# EAGLE board RC_Engine_Sound_ESP32 (EAGLE 7.6.0)
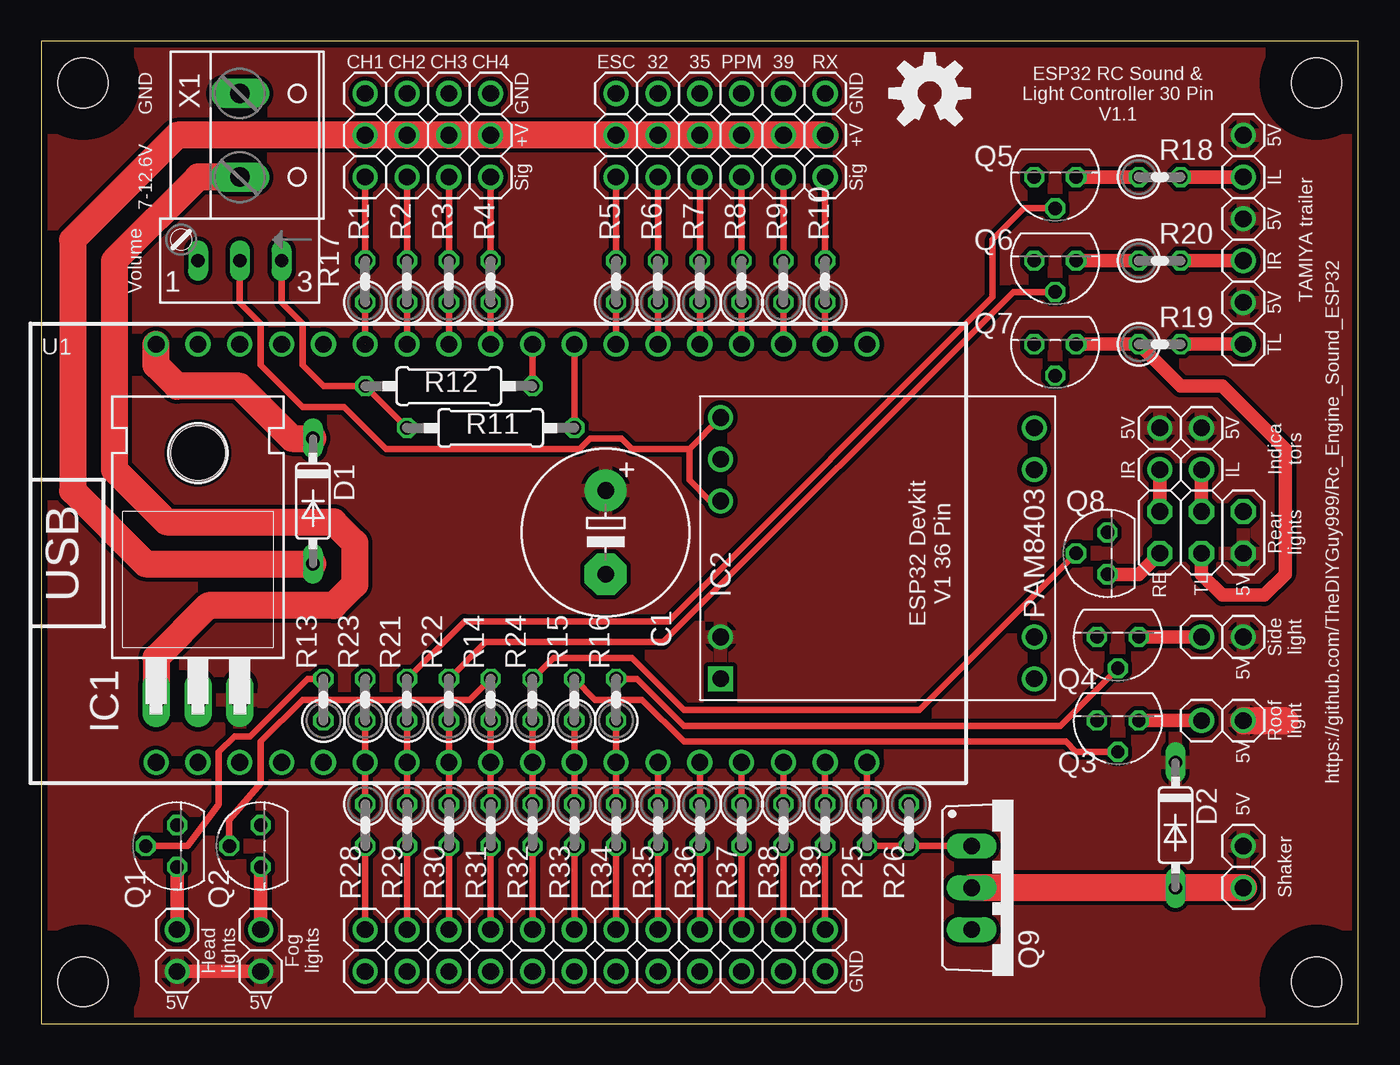
[diagram p0: board, top side]
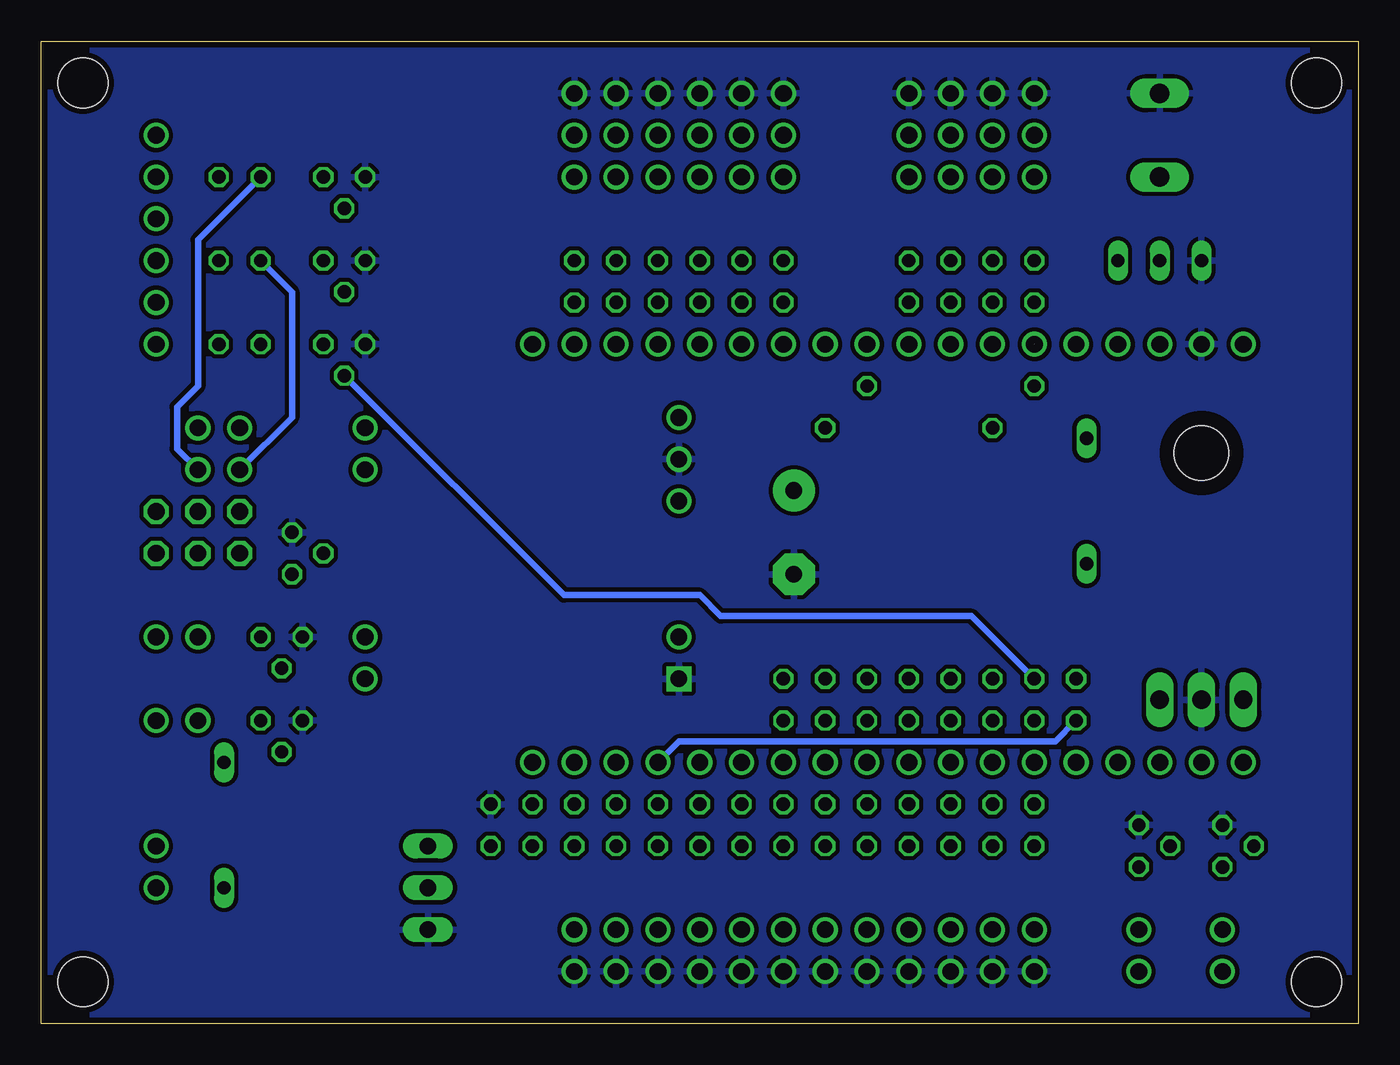
[diagram p1: board, bottom side, seen from below]

Size 80.01 x 59.69 mm. Coordinates in mm from the lower left corner, seen from the top.
Outline: 0,0 80.01,0 80.01,59.69 0,59.69 0,0
Copper layers (1*16): Top 0.0356mm / dielectric 1.5011mm / Bottom 0.0356mm
Design rules "OSHPark_LaenPCBOrder": minimum track width 6mil, minimum drill 13mil, track to track 6mil, track to pad 6mil, pad to pad 6mil, via to via 6mil, smd to smd 6mil, copper to edge 15mil, drill to drill 6mil, minimum pad ring 7mil, minimum via ring 7mil, stop-mask expansion 3mil, vias tented up to drill 0mil, thermal gap 10mil
Net classes: 0 5V: clearance 0.254 mm
Holes 3 mm at 2.54,57.15 2.54,2.54 77.47,2.54 77.47,57.15
tRestrict: area -0.7,53.9 to 5.8,60.4; area 74.2,53.9 to 80.7,60.4; area 74.2,-0.7 to 80.7,5.8; area -0.7,-0.7 to 5.8,5.8

## Footprints (pad centres in the part's own frame; a part is rotated, then mirrored left to right if it is on the bottom)
E5-10,5 = drill 1.016 pad 2.54: + -2.54,0 | drill 1.016 pad 2.54 octagon: - 2.54,0
DO35-7 = drill 0.813 long: A 3.81,0; C -3.81,0
TO220H = drill 1.118 long: 1 -2.54,-10.16; 2 0,-10.16; 3 2.54,-10.16 | hole 3.302: 0,4.826
PAM8403 = drill 1.016 square: 1 -7.62,8.89 | drill 1.016: 2 -5.08,8.89; 3 3.175,8.89; 4 5.715,8.89; 5 8.255,8.89; 6 7.62,-10.16; 7 5.08,-10.16; 8 -5.08,-10.16; 9 -7.62,-10.16
1X03 = drill 1.016 pad 1.524: 1 -2.54,0; 2 0,0; 3 2.54,0
1X02 = drill 1.016 pad 1.524: 1 -1.27,0; 2 1.27,0
1X06 = drill 1.016 pad 1.524: 1 -6.35,0; 2 -3.81,0; 3 -1.27,0; 4 1.27,0; 5 3.81,0; 6 6.35,0
2X03 = drill 1.016 octagon: 1 -2.54,-1.27; 2 -2.54,1.27; 3 0,-1.27; 4 0,1.27; 5 2.54,-1.27; 6 2.54,1.27
TO92 = drill 0.813 octagon: 1 1.27,0; 2 0,1.905; 3 -1.27,0
TO220BV = drill 1.016 long: D 0,-2.54; G -2.54,-2.54; S 2.54,-2.54
0207/2V = drill 0.813 octagon: 1 -1.27,0; 2 1.27,0
0207/10 = drill 0.813 octagon: 1 -5.08,0; 2 5.08,0
S64W = drill 0.813 long: A 2.54,1.27; E -2.54,1.27; S 0,1.27
ESP32-DEVKITV1 = drill 1.016: 3V3 -24.13,-12.7; D0 -13.97,-12.7; D1 13.97,-12.7; D2 -8.89,-12.7; D3 11.43,-12.7; D4 -6.35,-12.7; D5 1.27,-12.7; D6 -21.59,-12.7; D7 -19.05,-12.7; D8 -16.51,-12.7; D9 -13.97,12.7; D10 -16.51,12.7; D11 -19.05,12.7; D12 -8.89,12.7; D13 -11.44,12.7; D14 -6.35,12.7; D15 -11.43,-12.7; D16 -3.81,-12.7; D17 -1.27,-12.7; D18 3.81,-12.7; D19 6.35,-12.7; D21 8.89,-12.7; D22 16.51,-12.7; D23 19.05,-12.7; D25 1.27,12.7; D26 -1.27,12.7; D27 -3.81,12.7; D32 6.35,12.7; D33 3.81,12.7; D34 11.43,12.7; D35 8.89,12.7; D36 16.51,12.7; D39 13.97,12.7; EN 19.05,12.7; GND@1 -21.59,12.7; VIN -24.13,12.7
W237-132 = drill 1.194 long: 1 -2.54,-0.635; 2 2.54,-0.635

## Placement (x,y rotation side)
C1  1000uF  [E5-10,5]  34.29,29.85 270 top
D1  1N5819  [DO35-7]  16.51,31.75 270 top
D2  1N5819  [DO35-7]  68.9,12.06 270 top
IC1  7805T  [TO220H]  9.53,29.85 0 top
IC2  PAM8403  [PAM8403]  50.16,28.58 90 top
JP1  [1X03]  19.68,53.98 270 top
JP2  [1X03]  22.22,53.98 270 top
JP3  [1X03]  24.76,53.98 270 top
JP4  [1X03]  27.3,53.98 270 top
JP5  [1X03]  34.93,53.98 270 top
JP6  [1X03]  37.47,53.98 270 top
JP7  [1X03]  40.01,53.98 270 top
JP8  [1X03]  42.55,53.98 270 top
JP9  [1X03]  45.09,53.98 270 top
JP10  [1X03]  47.62,53.98 270 top
JP11  [1X02]  8.26,4.45 90 top
JP12  [1X02]  13.34,4.45 90 top
JP13  [1X02]  71.75,18.42 180 top
JP14  [1X02]  71.75,23.5 180 top
JP15  [1X06]  73.02,47.62 270 top
JP16  [2X03]  70.48,29.85 0 top
JP17  [1X02]  70.48,34.92 270 top
JP18  [1X02]  67.94,34.92 270 top
JP19  [1X02]  73.02,9.53 270 top
JP21  [1X02]  19.68,4.45 270 top
JP22  [1X02]  22.22,4.45 270 top
JP23  [1X02]  24.76,4.45 270 top
JP24  [1X02]  27.3,4.45 270 top
JP25  [1X02]  29.84,4.45 270 top
JP26  [1X02]  32.39,4.45 270 top
JP27  [1X02]  34.93,4.45 270 top
JP28  [1X02]  37.47,4.45 270 top
JP29  [1X02]  40.01,4.45 270 top
JP30  [1X02]  42.55,4.45 270 top
JP31  [1X02]  45.09,4.45 270 top
JP32  [1X02]  47.62,4.45 270 top
LOGO1  OSHW-LOGOM  [OSHW-LOGO-M]  53.98,56.52 0 top
Q1  BC337-25  [TO92]  8.26,10.79 90 top
Q2  BC337-25  [TO92]  13.34,10.79 90 top
Q3  BC337-25  [TO92]  65.41,18.42 180 top
Q4  BC337-25  [TO92]  65.41,23.5 180 top
Q5  BC337-25  [TO92]  61.59,51.43 180 top
Q6  BC337-25  [TO92]  61.59,46.35 180 top
Q7  BC337-25  [TO92]  61.59,41.27 180 top
Q8  BC337-25  [TO92]  64.77,28.58 90 top
Q9  IRLZ44N  [TO220BV]  59.05,8.26 270 top
R1  330R  [0207/2V]  19.68,45.09 90 top
R2  330R  [0207/2V]  22.22,45.09 90 top
R3  330R  [0207/2V]  24.76,45.09 90 top
R4  330R  [0207/2V]  27.3,45.09 90 top
R5  330R  [0207/2V]  34.93,45.09 90 top
R6  330R  [0207/2V]  37.47,45.09 90 top
R7  330R  [0207/2V]  40.01,45.09 90 top
R8  330R  [0207/2V]  42.55,45.09 90 top
R9  330R  [0207/2V]  45.09,45.09 90 top
R10  330R  [0207/2V]  47.62,45.09 90 top
R11  10k  [0207/10]  27.3,36.2 0 top
R12  10k  [0207/10]  24.76,38.73 0 top
R13  1k  [0207/2V]  17.14,19.69 90 top
R14  1k  [0207/2V]  27.3,19.69 90 top
R15  1k  [0207/2V]  32.39,19.69 90 top
R16  1k  [0207/2V]  34.93,19.69 90 top
R17  20k  [S64W]  12.06,47.62 180 top
R18  200R  [0207/2V]  67.94,51.43 0 top
R19  47R  [0207/2V]  67.94,41.27 0 top
R20  200R  [0207/2V]  67.94,46.35 0 top
R21  1k  [0207/2V]  22.22,19.69 90 top
R22  1k  [0207/2V]  24.76,19.69 90 top
R23  1k  [0207/2V]  19.68,19.69 90 top
R24  1k  [0207/2V]  29.84,19.69 90 top
R25  330R  [0207/2V]  50.16,12.06 270 top
R26  10k  [0207/2V]  52.71,12.06 270 top
R28  330R  [0207/2V]  19.68,12.06 270 top
R29  330R  [0207/2V]  22.22,12.06 270 top
R30  330R  [0207/2V]  24.76,12.06 270 top
R31  330R  [0207/2V]  27.3,12.06 270 top
R32  330R  [0207/2V]  29.84,12.06 270 top
R33  330R  [0207/2V]  32.39,12.06 270 top
R34  330R  [0207/2V]  34.93,12.06 270 top
R35  330R  [0207/2V]  37.47,12.06 270 top
R36  330R  [0207/2V]  40.01,12.06 270 top
R37  330R  [0207/2V]  42.55,12.06 270 top
R38  330R  [0207/2V]  45.09,12.06 270 top
R39  330R  [0207/2V]  47.62,12.06 270 top
U1  ESP32DEVKITV1  [ESP32-DEVKITV1]  31.11,28.58 0 top
X1  [W237-132]  12.7,53.98 270 top

## Library data of the parts
C1 R1-R16 R18-R26 R28-R39 = rcl
D1 D2 = diode
IC1 = linear
IC2 = 00_custom
JP1-JP19 JP21-JP32 = 00_custom_pinhead
LOGO1 = SparkFun-Aesthetics
Q1-Q8 = transistor-npn
Q9 = transistor-power
R17 = pot
U1 = ESP32-DEVKITV1_36pin
X1 = con-wago-508; OC_FARNELL: unknown; OC_NEWARK: unknown

## Nets
5V: C1.+ D2.C IC1.3 IC2.2 JP11.1 JP12.1 JP13.1 JP14.1 JP15.1 JP15.3 JP15.5 JP16.5 JP17.1 JP18.1 JP19.1
5V_ESC: D1.A JP1.2 JP2.2 JP3.2 JP4.2 JP5.2 JP6.2 JP7.2 JP8.2 JP9.2 JP10.2
BAT+: IC1.1 X1.2
D1: R38.1 U1.D1
D2: R21.1 R29.1 U1.D2
D3: R13.1 R37.1 U1.D3
D4: R22.1 R30.1 U1.D4
D5: R15.1 R33.1 U1.D5
D12: R2.1 U1.D12
D13: R1.1 U1.D13
D14: R3.1 U1.D14
D15: R23.1 R28.1 U1.D15
D16: R14.1 R31.1 U1.D16
D17: R24.1 R32.1 U1.D17
D18: R16.1 R34.1 U1.D18
D19: R35.1 U1.D19
D21: R36.1 U1.D21
D22: R39.1 U1.D22
D23: R25.1 U1.D23
D25: R11.2 U1.D25
D26: R12.2 U1.D26
D27: R4.1 U1.D27
D32: R6.1 U1.D32
D33: R5.1 U1.D33
D34: R8.1 U1.D34
D35: R7.1 U1.D35
D36: R10.1 U1.D36
D39: R9.1 U1.D39
GND: C1.- IC1.2 IC2.1 IC2.4 JP1.1 JP2.1 JP3.1 JP4.1 JP5.1 JP6.1 JP7.1 JP8.1 JP9.1 JP10.1 JP21.2 JP22.2 JP23.2 JP24.2 JP25.2 JP26.2 JP27.2 JP28.2 JP29.2 JP30.2 JP31.2 JP32.2 Q1.1 Q2.1 Q3.1 Q4.1 Q5.1 Q6.1 Q7.1 Q8.1 Q9.S R17.A R26.1 U1.GND@1 X1.1
INDICATOR_L: JP16.4 JP17.2 Q5.3 R18.1
INDICATOR_R: JP16.2 JP18.2 Q6.3 R20.1
N$1: IC2.3 IC2.5 R17.S
N$2: R11.1 R12.1 R17.E
N$3: JP1.3 R1.2
N$4: Q9.G R25.2 R26.2
N$5: JP2.3 R2.2
N$6: JP3.3 R3.2
N$7: JP4.3 R4.2
N$8: JP5.3 R5.2
N$9: D1.C U1.VIN
N$10: JP6.3 R6.2
N$11: JP7.3 R7.2
N$12: JP8.3 R8.2
N$13: JP9.3 R9.2
N$14: JP10.3 R10.2
N$15: D2.A JP19.2 Q9.D
N$16: Q1.2 R13.2
N$17: Q2.2 R14.2
N$18: JP11.2 Q1.3
N$19: JP12.2 Q2.3
N$20: Q7.2 R23.2
N$21: JP15.2 R18.2
N$22: Q5.2 R21.2
N$23: JP15.4 R20.2
N$24: Q6.2 R22.2
N$25: JP15.6 R19.2
N$26: Q8.2 R24.2
N$27: Q3.2 R15.2
N$28: JP13.2 Q3.3
N$29: Q4.2 R16.2
N$30: JP14.2 Q4.3
N$32: JP21.1 R28.2
N$33: JP22.1 R29.2
N$34: JP23.1 R30.2
N$35: JP24.1 R31.2
N$36: JP25.1 R32.2
N$37: JP26.1 R33.2
N$38: JP27.1 R34.2
N$39: JP28.1 R35.2
N$40: JP29.1 R36.2
N$41: JP30.1 R37.2
N$42: JP31.1 R38.2
N$43: JP32.1 R39.2
REVERSING: JP16.1 Q8.3
TAILLIGHTS: JP16.3 Q7.3 R19.1

## Tracks (layer width: path | path; a pad name or v marks a point on that pad's centre or on a via)
5V
  Top 0.813: JP12.1 JP11.1
  Top 1.626: JP13.1 75.56,18.42
  pour Top: -3.17,62.86 83.18,62.86 83.18,-1.91 -3.17,-1.91
5V_ESC
  Top 1.626: JP10.2 JP9.2 JP8.2 JP7.2 JP6.2 JP5.2 JP4.2 JP3.2 JP2.2 JP1.2 8.26,53.98 1.91,47.62 1.91,32.38 6.35,27.94 D1.A
BAT+
  Top 1.626: X1.2 9.53,51.43 4.45,46.35 4.45,33.66 7.62,30.48 17.78,30.48 19.05,29.21 19.05,26.67 17.78,25.4 10.16,25.4 6.99,22.23 IC1.1
D1
  Top 0.406: U1.D1 R38.1
D2
  Top 0.406: R29.1 U1.D2 R21.1
D3
  Top 0.406: U1.D3 R37.1
  Bottom 0.406: R13.1 18.41,17.15 41.27,17.15 U1.D3
D4
  Top 0.406: R30.1 U1.D4 R22.1
D5
  Top 0.406: R33.1 U1.D5 R15.1
D12
  Top 0.406: R2.1 U1.D12
D13  (1 unrouted)
  Top 0.406: R1.1 U1.D13
D14
  Top 0.406: R3.1 U1.D14
D15
  Top 0.406: R28.1 U1.D15 R23.1
D16
  Top 0.406: R31.1 U1.D16 R14.1
D17
  Top 0.406: R32.1 U1.D17 R24.1
D18
  Top 0.406: R34.1 U1.D18 R16.1
D19
  Top 0.406: U1.D19 R35.1
D21
  Top 0.406: U1.D21 R36.1
D22
  Top 0.406: U1.D22 R39.1
D23
  Top 0.406: U1.D23 R25.1
D25
  Top 0.406: U1.D25 R11.2
D26
  Top 0.406: U1.D26 R12.2
D27
  Top 0.406: R4.1 U1.D27
D32
  Top 0.406: R6.1 U1.D32
D33
  Top 0.406: R5.1 U1.D33
D34
  Top 0.406: R8.1 U1.D34
D35
  Top 0.406: R7.1 U1.D35
D36
  Top 0.406: R10.1 U1.D36
D39
  Top 0.406: R9.1 U1.D39
GND
  pour Bottom: -1.91,61.59 81.91,61.59 81.91,-1.91 -1.91,-1.91
INDICATOR_L
  Top 0.813: Q5.3 R18.1 | JP16.4 JP17.2
  Bottom 0.406: R18.1 70.48,47.62 70.48,38.73 71.75,37.46 71.75,34.92 JP17.2
INDICATOR_R
  Top 0.813: Q6.3 R20.1 | JP16.2 JP18.2
  Bottom 0.406: R20.1 64.77,44.45 64.77,36.83 JP18.2
N$1
  Top 0.406: R17.S 12.06,43.81 13.34,42.54 13.34,40 15.88,37.46 18.41,37.46 20.95,34.92 32.7,34.92 33.34,35.56 35.24,35.56 35.88,34.92 39.37,34.92 | 39.37,34.92 IC2.5 | IC2.3 40.64,31.75 39.37,33.02 39.37,34.92
N$2
  Top 0.406: R11.1 R12.1 17.14,38.73 15.88,40 15.88,42.54 14.61,43.81 R17.E
N$3
  Top 0.406: JP1.3 R1.2
N$4
  Top 0.406: Q9.G R26.2 R25.2
N$5
  Top 0.406: JP2.3 R2.2
N$6
  Top 0.406: JP3.3 R3.2
N$7
  Top 0.406: JP4.3 R4.2
N$8
  Top 0.406: JP5.3 R5.2
N$9
  Top 1.626: U1.VIN 6.99,40 8.26,38.73 12.06,38.73 15.24,35.56 D1.C
N$10
  Top 0.406: JP6.3 R6.2
N$11
  Top 0.406: JP7.3 R7.2
N$12
  Top 0.406: JP8.3 R8.2
N$13
  Top 0.406: JP9.3 R9.2
N$14
  Top 0.406: JP10.3 R10.2
N$15
  Top 1.626: JP19.2 D2.A Q9.D
N$16
  Top 0.406: R13.2 16.19,20.96 12.7,17.46 11.75,17.46 10.79,16.51 10.79,13.33 8.89,10.79 Q1.2
N$17
  Top 0.406: R14.2 26.04,19.69 15.88,19.69 13.34,17.15 13.34,14.61 11.43,12.38 Q2.2
N$18
  Top 0.813: JP11.2 Q1.3
N$19
  Top 0.813: Q2.3 JP12.2
N$20
  Bottom 0.406: R23.2 23.49,24.77 38.73,24.77 40.01,26.04 48.26,26.04 Q7.2
N$21
  Top 0.813: R18.2 JP15.2
N$22
  Top 0.406: R21.2 25.72,24.45 38.1,24.45 57.79,44.13 57.79,47.62 59.69,49.53 Q5.2
N$23
  Top 0.813: R20.2 JP15.4
N$24
  Top 0.406: R22.2 26.99,23.18 37.78,23.18 59.05,44.45 Q6.2
N$25
  Top 0.813: R19.2 JP15.6
N$26
  Top 0.406: R24.2 31.11,22.23 35.88,22.23 39.05,19.05 53.34,19.05 Q8.2
N$27
  Top 0.406: R15.2 33.66,19.69 36.51,19.69 39.05,17.15 62.23,17.15 62.87,16.51 Q3.2
N$28
  Top 0.813: Q3.3 JP13.2
N$29
  Top 0.406: R16.2 36.2,20.96 39.05,18.1 61.91,18.1 Q4.2
N$30
  Top 0.813: Q4.3 JP14.2
N$32
  Top 0.406: R28.2 JP21.1
N$33
  Top 0.406: R29.2 JP22.1
N$34
  Top 0.406: R30.2 JP23.1
N$35
  Top 0.406: R31.2 JP24.1
N$36
  Top 0.406: R32.2 JP25.1
N$37
  Top 0.406: R33.2 JP26.1
N$38
  Top 0.406: R34.2 JP27.1
N$39
  Top 0.406: R35.2 JP28.1
N$40
  Top 0.406: R36.2 JP29.1
N$41
  Top 0.406: R37.2 JP30.1
N$42
  Top 0.406: R38.2 JP31.1
N$43
  Top 0.406: R39.2 JP32.1
REVERSING
  Top 0.813: Q8.3 66.67,27.31 JP16.1
TAILLIGHTS
  Top 0.813: Q7.3 R19.1 69.21,38.73 71.75,38.73 75.56,34.92 75.56,27.31 74.3,26.04 71.75,26.04 70.48,27.31 JP16.3

## Text on the board
tNames: CH1 | CH2 | CH3 | CH4 | ESC | 32 | 35 | PPM | 39 | RX | GND | GND | GND | ESP32 RC Sound & / Light Controller 30 Pin / V1.1 | +V | +V | 5V | 7-12.6V | Sig | Sig | IL | 5V | TAMIYA trailer | Volume | IR | 5V | TL | 5V | 5V | Indica / tors | IR | IL | https://github.com/TheDIYGuy999/Rc_Engine_Sound_ESP32 | Rear / lights | RE | TL | 5V | Side / light | 5V | Roof / light | 5V | 5V | Shaker | Head / lights | Fog / lights | GND | 5V | 5V